# EAGLE board PBC-1 (EAGLE 7.1.0)
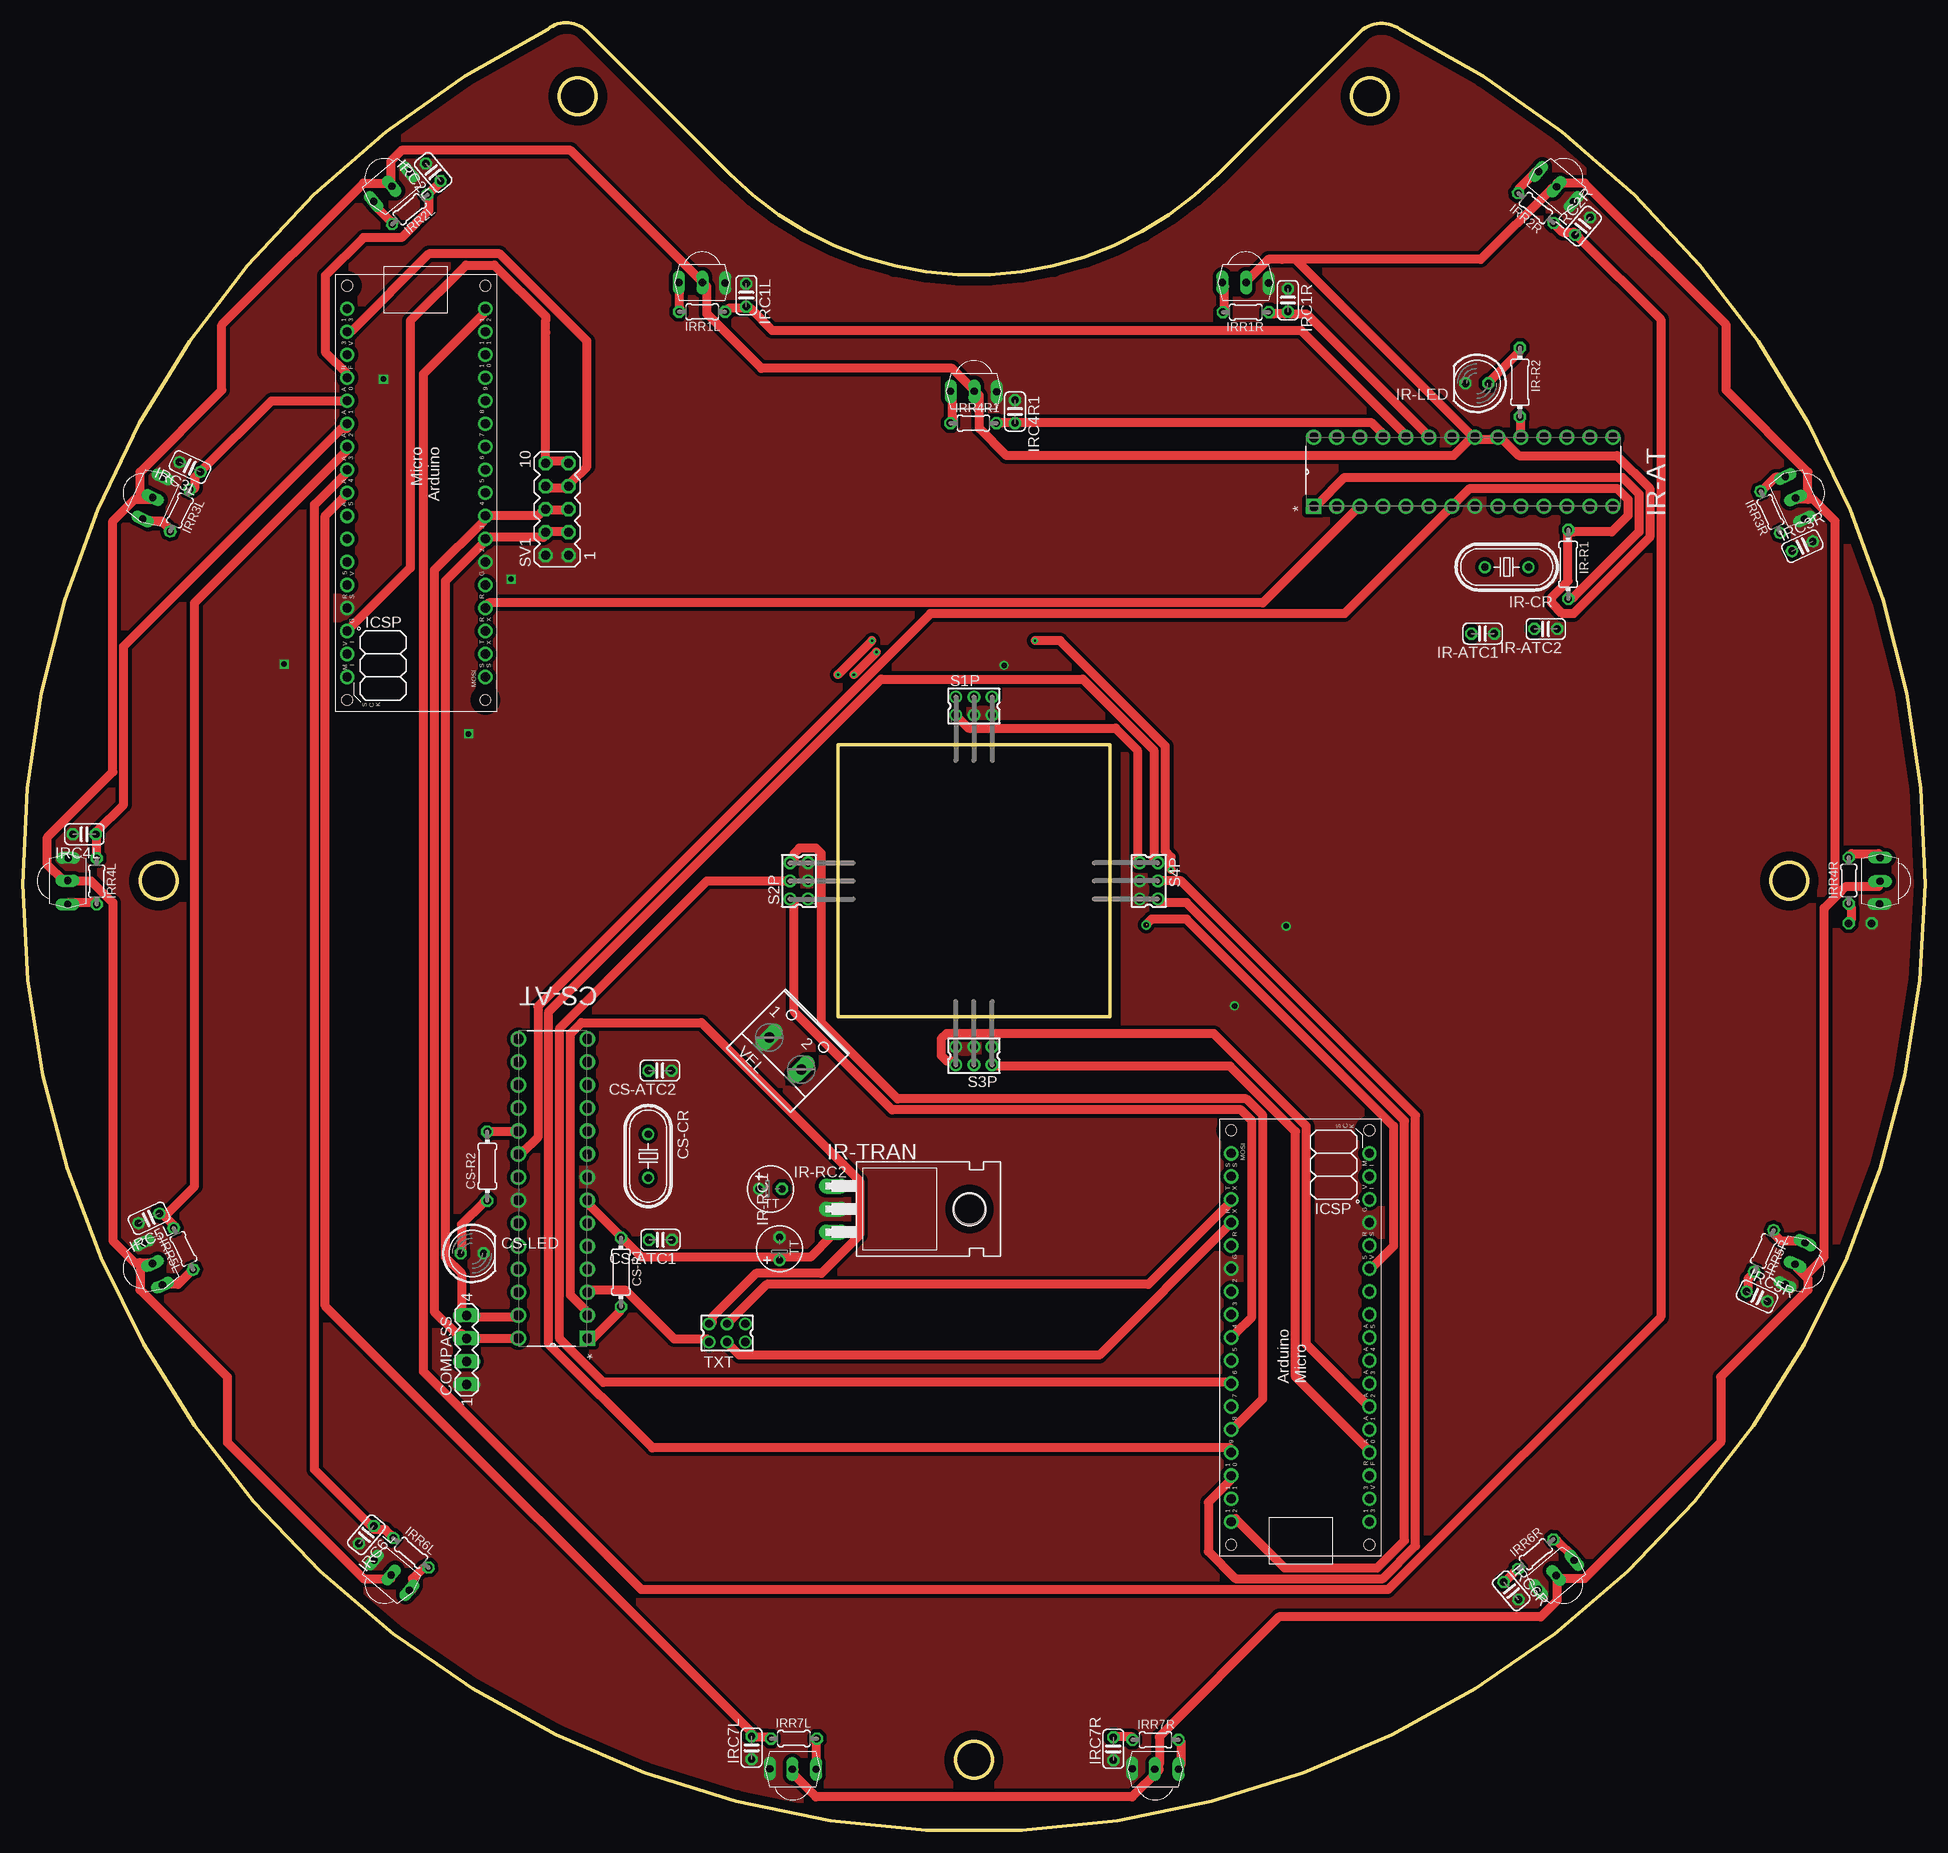
[diagram p0: board, top side]
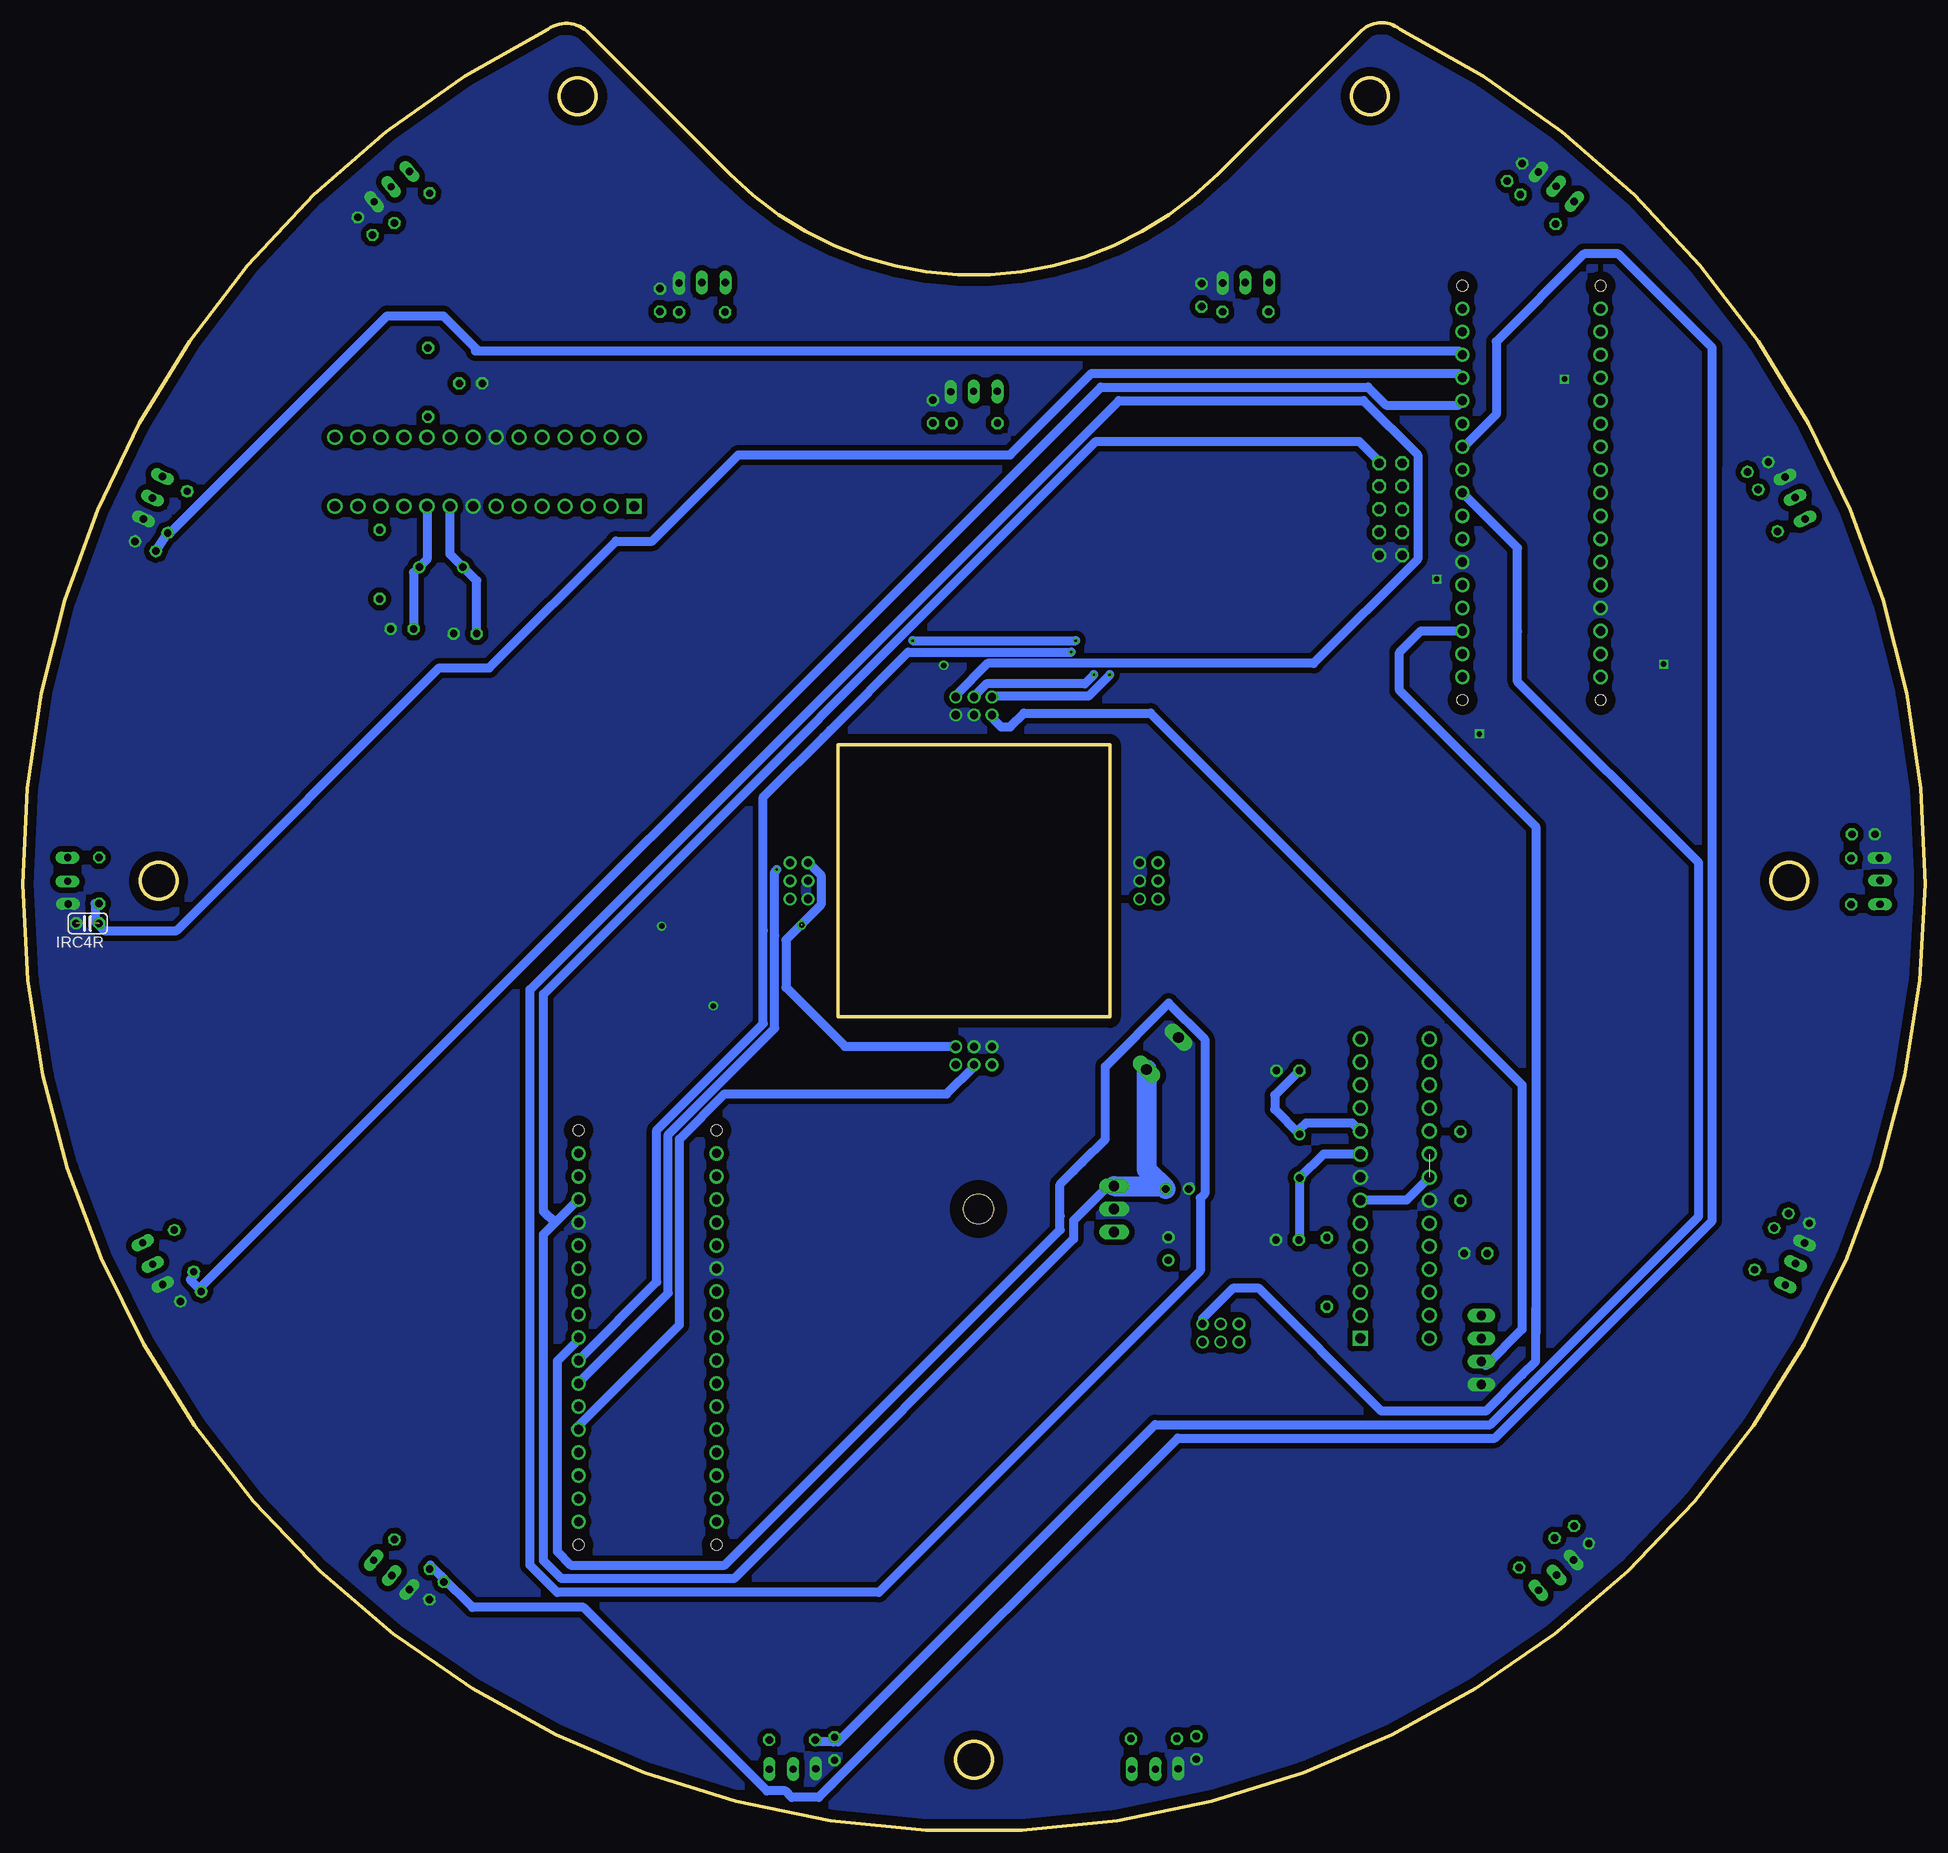
[diagram p1: board, bottom side, seen from below]

Size 210 x 199.47 mm. Coordinates in mm from the lower left corner, seen from the top.
Outline: 131.97,182.79 147.7,198.51 arc-76 152,198.76 arc-307 58,198.76 arc-86 62.4,198.41 78.03,182.79 arc90 131.97,182.79
Outline: 90,119.76 90,89.76 120,89.76 120,119.76 90,119.76
Outline: circle at 195,104.76 radius 2
Outline: circle at 15,104.76 radius 2
Outline: circle at 61.27,191.34 radius 2
Outline: circle at 148.73,191.34 radius 2
Outline: circle at 105,7.76 radius 2
Copper layers (1*16): Top 0.035mm / dielectric 1.5mm / Bottom 0.035mm
Design rules "default *": minimum track width 1mm, minimum drill 10mil, track to track 8mil, track to pad 8mil, pad to pad 8mil, via to via 8mil, smd to smd 8mil, copper to edge 40mil, drill to drill 8mil, minimum pad ring 10mil, minimum via ring 8mil, stop-mask expansion 4mil, vias tented up to drill 0mil, thermal gap 10mil

## Footprints (pad centres in the part's own frame; a part is rotated, then mirrored left to right if it is on the bottom)
MA04-1 = drill 1.016 long: 1 -3.81,0; 2 -1.27,0; 3 1.27,0; 4 3.81,0
DIP254P762X457-28 = drill 1.118 square: 1 -7.62,33.02 | drill 1.118: 2 -7.62,30.48; 3 -7.62,27.94; 4 -7.62,25.4; 5 -7.62,22.86; 6 -7.62,20.32; 7 -7.62,17.78; 8 -7.62,15.24; 9 -7.62,12.7; 10 -7.62,10.16; 11 -7.62,7.62; 12 -7.62,5.08; 13 -7.62,2.54; 14 -7.62,0; 15 0,0; 16 0,2.54; 17 0,5.08; 18 0,7.62; 19 0,10.16; 20 0,12.7; 21 0,15.24; 22 0,17.78; 23 0,20.32; 24 0,22.86; 25 0,25.4; 26 0,27.94; 27 0,30.48; 28 0,33.02
C025-024X044 = drill 0.813 octagon: 1 -1.27,0; 2 1.27,0
HC49U70 = drill 0.813: 1 -2.413,0; 2 2.413,0
LED5MM = drill 0.813 octagon: A -1.27,0; K 1.27,0
0204/7 = drill 0.813 octagon: 1 -3.81,0; 2 3.81,0
TT2D5 = drill 0.813: + -1.27,0 | drill 0.813 octagon: - 1.27,0
TO220H = drill 1.118 long: 1 -2.54,-10.16; 2 0,-10.16; 3 2.54,-10.16 | hole 3.302: 0,4.826
TSOP18XX = drill 0.813 long: GND -2.539,0.027; OUT 2.579,-0.027; VCC -0.041,-0.027
0204/5 = drill 0.813 octagon: 1 -2.54,0; 2 2.54,0
ARDUINO_MICRO = drill 1.016 pad 1.575: 3V3 6.35,1.27; +5V 31.75,1.27; A0 11.43,1.27; A1 13.97,1.27; A2 16.51,1.27; A3 19.05,1.27; A4 21.59,1.27; A5 24.13,1.27; D2 29.21,16.51; D3 26.67,16.51; D4 24.13,16.51; D5 21.59,16.51; D6 19.05,16.51; D7 16.51,16.51; D8 13.97,16.51; D9 11.43,16.51; D10 8.89,16.51; D11 6.35,16.51; D12 3.81,16.51; D13 3.81,1.27; GND 31.75,16.51; GND. 36.83,1.27; MISO] 41.91,1.27; MOSI 44.45,16.51; NC 26.67,1.27; NC. 29.21,1.27; REF 8.89,1.27; RST 34.29,16.51; RST. 34.29,1.27; RX1 36.83,16.51; SCK 44.45,1.27; SS 41.91,16.51; TX1 39.37,16.51; VIN 39.37,1.27 | hole 1.2: 1.27,1.27; 1.27,16.51; 46.99,16.51; 46.99,1.27
332-06 = drill 0.9 pad 1.27: 1 -2,-1; 2 -2,1; 3 0,-1; 4 0,1; 5 2,-1; 6 2,1
MA05-2 = drill 1.016 octagon: 1 -5.08,-1.27; 2 -5.08,1.27; 3 -2.54,-1.27; 4 -2.54,1.27; 5 0,-1.27; 6 0,1.27; 7 2.54,-1.27; 8 2.54,1.27; 9 5.08,-1.27; 10 5.08,1.27
87758-0616 = drill 0.9 pad 1.27: 1 -2,-1; 2 -2,1; 3 0,-1; 4 0,1; 5 2,-1; 6 2,1
W237-102 = drill 1.194 long: 1 -2.5,-1.27; 2 2.5,-1.27

## Placement (x,y rotation side)
COMPASS  [MA04-1]  49,53 90 top
CS-AT  ATMEGA328P-PU  [DIP254P762X457-28]  54.72,87.31 180 top
CS-ATC1  22 pF  [C025-024X044]  70.4,65.15 180 top
CS-ATC2  22 pF  [C025-024X044]  70.34,83.83 180 top
CS-CR  16 MHz  [HC49U70]  69.04,74.39 270 top
CS-LED  [LED5MM]  49.61,63.66 0 top
CS-R1  10k  [0204/7]  66.04,61.59 270 top
CS-R2  220  [0204/7]  51.29,73.27 90 top
IR-AT  ATMEGA328P-PU  [DIP254P762X457-28]  175.53,153.71 90 top
IR-ATC1  22 pF  [C025-024X044]  161.15,132.04 180 top
IR-ATC2  22 pF  [C025-024X044]  168.11,132.56 180 top
IR-CR  16 MHz  [HC49U70]  163.81,139.39 180 top
IR-LED  [LED5MM]  160.53,159.66 180 top
IR-R1  10k  [0204/7]  170.59,139.68 270 top
IR-R2  220  [0204/7]  165.26,159.77 270 top
IR-RC1  10uf  [TT2D5]  83.55,64.16 90 top
IR-RC2  10uf  [TT2D5]  82.56,70.77 0 top
IR-TRAN  7805  [TO220H]  99.68,68.55 270 top
IRC1L  [C025-024X044]  79.87,169.4 270 top
IRC1R  [C025-024X044]  139.65,168.85 270 top
IRC2L  [C025-024X044]  45.32,182.95 130 top
IRC2R  [C025-024X044]  172.19,177.01 50 top
IRC3L  [C025-024X044]  18.47,150.43 155 top
IRC3R  [C025-024X044]  196.45,141.69 25 top
IRC4L  [C025-024X044]  6.81,109.91 180 top
IRC4R  [C025-024X044]  202.82,100.07 180 bottom
IRC4R1  [C025-024X044]  109.54,156.55 270 top
IRC5L  [C025-024X044]  13.94,67.52 205 top
IRC5R  [C025-024X044]  191.43,58.9 335 top
IRC6L  [C025-024X044]  37.94,32.6 230 top
IRC6R  [C025-024X044]  164.3,26.42 310 top
IRC7L  [C025-024X044]  80.45,9.1 90 top
IRC7R  [C025-024X044]  120.39,8.99 90 top
IRD1L  TSOP2240  [TSOP18XX]  75,170.76 180 top
IRD1R  TSOP2240  [TSOP18XX]  135,170.76 180 top
IRD2L  TSOP2240  [TSOP18XX]  40.73,181.36 220 top
IRD2R  TSOP2240  [TSOP18XX]  169.27,181.36 140 top
IRD3L  TSOP2240  [TSOP18XX]  14.37,147.02 245 top
IRD3R  TSOP1840  [TSOP18XX]  195.63,147.02 115 top
IRD4L  TSOP2240  [TSOP18XX]  5,104.76 270 top
IRD4R  TSOP2240  [TSOP18XX]  205,104.76 90 top
IRD5L  TSOP2240  [TSOP18XX]  14.37,62.5 295 top
IRD5R  TSOP2240  [TSOP18XX]  195.63,62.5 65 top
IRD6L  TSOP2240  [TSOP18XX]  40.73,28.16 320 top
IRD6R  TSOP2240  [TSOP18XX]  169.27,28.16 40 top
IRD7L  TSOP2240  [TSOP18XX]  85,6.76 0 top
IRD7R  TSOP2240  [TSOP18XX]  125,6.76 0 top
IRDP  TSOP2240  [TSOP18XX]  105,158.76 180 top
IRR1L  [0204/5]  75.01,167.56 180 top
IRR1R  [0204/5]  135,167.53 180 top
IRR2L  [0204/5]  42.73,178.86 220 top
IRR2R  [0204/5]  167.02,179.01 140 top
IRR3L  [0204/5]  17.36,145.63 245 top
IRR3R  [0204/5]  192.91,145.45 115 top
IRR4L  [0204/5]  8.17,104.71 270 top
IRR4R  [0204/5]  201.56,104.8 90 top
IRR4R1  [0204/5]  104.94,155.27 0 top
IRR5L  [0204/5]  17.75,64.15 115 top
IRR5R  [0204/5]  192.19,63.93 245 top
IRR6L  [0204/5]  42.87,30.61 320 top
IRR6R  [0204/5]  167.01,30.47 40 top
IRR7L  [0204/5]  85.12,10.12 0 top
IRR7R  [0204/5]  125.05,9.97 0 top
PCB1  ARDUINO_MICRO  [ARDUINO_MICRO]  149.91,30.24 90 top
PCB3  ARDUINO_MICRO  [ARDUINO_MICRO]  34.56,171.71 270 top
S1P  [332-06]  105,124.06 0 top
S2P  [332-06]  85.7,104.76 90 top
S3P  [332-06]  105,85.46 180 top
S4P  [332-06]  124.3,104.76 270 top
SV1  [MA05-2]  59,145.76 90 top
TXT  [87758-0616]  77.76,54.87 0 top
VEL  [W237-102]  85.07,86.61 315 top

## Library data of the parts
COMPASS SV1 = con-lstb; OC_FARNELL: unknown; OC_NEWARK: unknown
CS-AT IR-AT = Atmel_By_element14_Batch_1-00; MPN: ATMEGA328P-PU; OC_FARNELL: 1715487; OC_NEWARK: 15R0268; PACKAGE: PDIP-28; SUPPLIER: Atmel
CS-ATC1 CS-ATC2 CS-R1 CS-R2 IR-ATC1 IR-ATC2 IR-R1 IR-R2 IRC1L IRC1R IRC2L IRC2R IRC3L IRC3R IRC4L IRC4R IRC4R1 IRC5L IRC5R IRC6L IRC6R IRC7L IRC7R IRR1L IRR1R IRR2L IRR2R IRR3L IRR3R IRR4L IRR4R IRR4R1 IRR5L IRR5R IRR6L IRR6R IRR7L IRR7R = rcl
CS-CR IR-CR = crystal; OC_FARNELL: unknown; OC_NEWARK: unknown
CS-LED IR-LED = led
IR-RC1 IR-RC2 = resistor
IR-TRAN = linear
IRD1L IRD1R IRD2L IRD2R IRD3L IRD3R IRD4L IRD4R IRD5L IRD5R IRD6L IRD6R IRD7L IRD7R IRDP = tsop
PCB1 PCB3 = E14_Arduino_revB
S1P S2P S3P S4P = con-garry
TXT = con-molex; MPN: 87758-0616; OC_FARNELL: 7472323; OC_NEWARK: 25M5667
VEL = con-wago-500; MPN: 237-102; OC_FARNELL: unknown; OC_NEWARK: 70K9898

## Nets
+3V3: PCB3.3V3 SV1.7 SV1.8
+5V-IR: CS-AT.7 CS-AT.20 CS-AT.21 CS-R1.1 IR-AT.7 IR-AT.20 IR-AT.21 IR-R1.1 IR-RC1.+ IR-TRAN.3 IRD1L.VCC IRD1R.VCC IRD2L.VCC IRD2R.VCC IRD3L.VCC IRD3R.VCC IRD4L.VCC IRD4R.VCC IRD5L.VCC IRD5R.VCC IRD6L.VCC IRD6R.VCC IRD7L.VCC IRD7R.VCC IRDP.VCC
+5V-LT: COMPASS.2 PCB1.+5V S1P.1 S3P.1 S4P.1
A0: PCB1.A0 S3P.2
A0IR: IRC7R.2 IRR7R.1 PCB3.D4
A1: PCB1.A1 S3P.4
A1IR: IRC6R.1 IRR6R.1 PCB3.D6
A2: PCB1.A2 S3P.6
A2IR: IRC5R.1 IRR5R.2 PCB3.D8
A3: PCB1.A3 S1P.2
A3IR: IRC4R.1 IRR4R.1 PCB3.D9
A4: PCB1.A4 S1P.4
A4IR: IRC3R.1 IRR3R.1 PCB3.D10
A5: PCB1.A5 S1P.6
A5IR: IRC2R.1 IRR2R.1 PCB3.D12
A6: PCB1.D4 S2P.2
A6IR: IRC2L.1 IRR2L.1 PCB3.A0
A7: PCB1.D6 S2P.4
A7IR: IRC3L.1 IRR3L.1 PCB3.A1
A8: PCB1.D8 S2P.6
A8IR: IRC4L.1 IRR4L.1 PCB3.A2
A9: PCB1.D9 S4P.2
A9IR: IRC5L.1 IRR5L.2 PCB3.A3
A10: PCB1.D10 S4P.4
A10IR: IRC6L.1 IRR6L.1 PCB3.A4
A11: PCB1.D12 S4P.6
A11IR: IRC7L.2 IRR7L.1 PCB3.A5
GND: COMPASS.1 CS-AT.8 CS-AT.22 CS-ATC1.1 CS-ATC2.1 CS-LED.K IR-AT.8 IR-AT.22 IR-ATC1.1 IR-ATC2.1 IR-LED.K IR-RC1.- IR-RC2.+ IR-TRAN.2 IRC1L.1 IRC1R.1 IRC2L.2 IRC2R.2 IRC3L.2 IRC3R.2 IRC4L.2 IRC4R1.1 IRC4R.2 IRC5L.2 IRC5R.2 IRC6L.2 IRC6R.2 IRC7L.1 IRC7R.1 IRD1L.GND IRD1R.GND IRD2L.GND IRD2R.GND IRD3L.GND IRD3R.GND IRD4L.GND IRD4R.GND IRD5L.GND IRD5R.GND IRD6L.GND IRD6R.GND IRD7L.GND IRD7R.GND IRDP.GND PCB1.GND PCB1.GND. PCB3.GND PCB3.GND. S1P.3 S1P.5 S2P.3 S2P.5 S3P.3 S3P.5 S4P.3 S4P.5 SV1.1 SV1.2 VEL.1
IR-CR: IR-AT.9 IR-ATC1.2 IR-CR.2
IRLOUT: IR-AT.24 IRC1L.2 IRR1L.1
IRPOUT: IR-AT.25 IRC4R1.2 IRR4R1.2
IRROUT: IR-AT.23 IRC1R.2 IRR1R.1
N$1: IR-LED.A IR-R2.1
N$2: IR-AT.19 IR-R2.2
N$4: IRD4R.OUT IRR4R.2
N$7: IRD7R.OUT IRR7R.2
N$8: IRD5R.OUT IRR5R.1
N$9: IRD2R.OUT IRR2R.2
N$11: IRD3R.OUT IRR3R.2
N$13: IRD1R.OUT IRR1R.2
N$14: IRD6R.OUT IRR6R.2
N$20: IRD3L.OUT IRR3L.2
N$21: IRD2L.OUT IRR2L.2
N$23: IRD1L.OUT IRR1L.2
N$24: IRD4L.OUT IRR4L.2
N$25: IRD5L.OUT IRR5L.1
N$27: IRD6L.OUT IRR6L.2
N$29: IRD7L.OUT IRR7L.2
N$32: S2P.1
N$33: IRDP.OUT IRR4R1.1
N$34: CS-LED.A CS-R2.1
N$35: CS-AT.19 CS-R2.2
PB6-A3: CS-AT.9 CS-ATC1.2 CS-CR.2
PB7-A1: IR-AT.10 IR-ATC2.2 IR-CR.1
PB7-A3: CS-AT.10 CS-ATC2.2 CS-CR.1
RESET-AT1: IR-AT.1 IR-R1.2
RESET-AT3: CS-AT.1 CS-R1.2
RX-CS: CS-AT.2 TXT.2
RX-IR: TXT.5
RX-LT: PCB1.RX1 TXT.3
SCL: COMPASS.3 CS-AT.28 PCB3.D3 SV1.5 SV1.6
SDA: COMPASS.4 CS-AT.27 PCB3.D2 SV1.3 SV1.4
TX-CS: CS-AT.3 TXT.1
TX-IR: PCB3.TX1 TXT.6
TX-IR2: IR-AT.3 PCB3.RX1
TX-LT: PCB1.TX1 TXT.4
VCC: IR-RC2.- IR-TRAN.1 PCB1.VIN PCB3.VIN SV1.9 SV1.10 VEL.2

## Tracks (layer width: path | path; a pad name or v marks a point on that pad's centre or on a via)
+3V3
  Top 1: SV1.8 58.07,148.07 59.88,148.07 SV1.7 60.48,148.68 62.28,150.48 62.28,164.32 52.66,173.94 44.84,173.94 36.42,165.52 PCB3.3V3
+5V-IR  (1 unrouted)
  Top 1: 40.63,181.76 40.63,184.17 41.83,185.37 60.48,185.37 74.92,170.94 IRD1L.VCC 75.52,170.33 75.52,167.33 81.54,161.31 102.59,161.31 105,158.9 IRDP.VCC 105.6,158.3 105.6,154.69 108.61,151.68 157.94,151.68 159.74,153.49 IR-AT.21 | 12.95,62.65 12.35,62.65 9.95,65.05 9.95,102.35 7.54,104.76 5.13,104.76 IRD4L.VCC 4.53,104.76 2.73,106.56 2.73,109.57 9.95,116.79 9.95,144.47 12.35,146.87 12.95,146.87 | 12.95,62.65 14.16,62.65 IRD5L.VCC | 12.95,62.65 12.95,59.64 22.58,50.01 22.58,42.79 37.62,27.75 40.63,27.75 IRD6L.VCC | 12.95,146.87 14.16,146.87 IRD3L.VCC | 40.63,181.76 37.62,181.76 21.98,166.12 21.98,158.9 12.95,149.88 12.95,146.87 | 40.63,181.76 IRD2L.VCC | CS-AT.20 55.07,74.68 56.87,76.48 56.87,90.92 100.19,134.24 145.91,134.24 157.34,145.67 IR-AT.7 157.94,146.27 159.74,148.07 175.99,148.07 177.19,146.87 177.19,145.07 175.39,143.26 171.17,143.26 IR-R1.1 170.57,143.26 170.57,137.85 168.77,136.04 168.77,135.44 169.97,134.24 171.17,134.24 179.6,142.66 179.6,148.07 175.99,151.68 165.16,151.68 163.35,153.49 IR-AT.20 162.75,153.49 160.35,153.49 IR-AT.21 | IRD1R.VCC 135.08,170.94 137.48,173.34 139,173.34 140.49,173.34 159.74,154.09 IR-AT.21 | 168.77,181.16 IRD2R.VCC 169.37,181.76 172.38,181.76 188.02,166.12 188.02,158.9 197.04,149.88 197.04,146.87 | IRD7L.VCC 85.15,6.7 85.15,6.1 87.55,3.69 122.44,3.69 125.45,6.7 IRD7R.VCC 125.45,7.3 125.45,10.31 138.69,23.54 167.56,23.54 169.37,25.35 169.37,27.75 | 169.37,27.75 172.38,27.75 187.42,42.79 187.42,50.01 197.04,59.64 197.04,60.84 196.74,61.14 | 196.74,61.14 195.84,62.05 IRD5R.VCC | 200.35,103.26 198.85,101.75 198.85,63.25 196.74,61.14
  Top 1: 200.35,103.26 201.25,104.16 204.86,104.16 IRD4R.VCC | 197.04,146.87 197.64,146.87 200.05,144.47 200.05,103.56 200.35,103.26 | 197.04,146.87 195.84,146.87 IRD3R.VCC | 169.37,27.75 IRD6R.VCC | CS-AT.7 62.28,69.27 65.89,65.66 CS-R1.1 66.5,65.05 68.3,63.25 83.34,63.25 IR-RC1.+ 83.94,63.25 86.95,63.25 89.36,65.66 IR-TRAN.3
  Top 1.016: 168.77,181.16 160.95,173.34 139,173.34
  Bottom 1.016: CS-AT.21 57.26,69.53 CS-AT.7
+5V-LT  (via drill 0.6)  (2 unrouted)
  Top 1: S1P.1 103.19,122.81 104.4,121.6 120.64,121.6 123.05,119.2 123.05,107.17 S4P.1 123.05,106.56 | 128.46,100.55 151.32,77.69 151.32,64.45 148.92,62.05 PCB1.+5V
  Top 1.016: 128.46,100.55 124.61,100.55 124.04,99.97
  Bottom 1: COMPASS.2 48.5,51.26 44.5,55.26 44.5,82.26 85.5,123.26 99.5,123.26 101,121.76 102,121.76 103,122.76 S1P.1 | 124.04,99.97 121.87,102.13 121.87,105.38 123.25,106.76 S4P.1 | 125.25,98.76 125.75,98.26 125.75,93.01 119.25,86.51 107,86.51 S3P.1
  Bottom 1.016: 124.04,99.97 125.25,98.76
  other vias: 124.02,99.89
A0
  Top 1: S3P.2 107.4,84.31 133.27,84.31 140.49,77.09 140.49,50.01 148.31,42.19 PCB1.A0
A0IR
  Top 1: IRC7R.2 120.64,10.31 122.44,10.31 IRR7R.1
  Bottom 1: IRR7R.1 122.5,9.76 120.5,9.76 IRC7R.2 120,9.76 85,44.76 48,44.76 25,67.76 25,106.76 45,126.76 45,132.26 | 51,147.26 PCB3.D4
  Bottom 1.016: 45,132.26 45,141.51 PCB3.D4
A1
  Bottom 1: S3P.4 105,84.26 108,81.26 132.5,81.26 137.5,76.26 137.5,55.76 149,44.26 PCB1.A1
A1IR
  Top 1: IRC6R.1 163.96,27.75 165.16,28.96 IRR6R.1
  Bottom 1: IRC6R.1 163.5,27.76 163.78,28.04 165,29.26 IRR6R.1 | 23.5,150.76 23.5,67.26 47.5,43.26 82.5,43.26 120.69,5.06 121,4.76 | 51,152.76 PCB3.D6
  Bottom 1.016: 23.5,150.76 23.5,163.59 33.87,173.96 37.66,173.96 47.34,164.28 47.34,156.25 50.93,152.66 PCB3.D6 | 163.78,28.04 160.33,24.59 148.11,24.59 127.84,4.33 125.81,4.33 125.12,3.63 122.13,3.63 120.69,5.06
A2
  Top 1: S3P.6 102.59,84.91 101.99,84.91 101.39,85.51 101.39,87.31 101.99,87.91 131.47,87.91 141.7,77.69 141.7,53.62 148.31,47.01 PCB1.A2
A2IR
  Top 1: IRC5R.1 190.43,59.64 190.43,60.84 191.03,61.44 IRR5R.2
  Bottom 1: 190.5,59.76 191.5,60.76 191,61.26 IRR5R.2 | 190.5,59.76 91,159.26 61.5,159.26 59.5,157.26 51.5,157.26 PCB3.D8 | 190.5,59.76 IRC5R.1
A3  (via drill 0.25)
  Top 1: v93.75,131.26 v90,127.51 | v111.75,131.26 114.5,131.26 126.12,119.63 126.12,108.01 126.75,107.38 v126.75,106.01
  Bottom 1: v90,127.51 92.37,125.13 103,125.13 S1P.2 | v111.75,131.26 v93.75,131.26 | 127,98.76 127,88.51 138.75,76.76 138.75,59.26 148.62,49.38 PCB1.A3
  Bottom 1.016: 127,98.76 127,105.76 v126.75,106.01
A3IR
  Top 1: IRC4R.1 201.86,100.55 201.86,101.75 IRR4R.1
  Bottom 1: IRR4R.1 202,102.26 202,100.26 IRC4R.1 201.5,99.76 201,99.26 193,99.26 164,128.26 158.5,128.26 144.5,142.26 140.5,142.26 131,151.76 101,151.76 92,160.76 51.5,160.76 PCB3.D9
A4  (via drill 0.25)
  Top 1: v94.25,130.01 v91.75,127.51
  Bottom 1: v91.75,127.51 92.75,126.51 103.62,126.51 105,125.13 S1P.4 | v94.25,130.01 112.25,130.01 120.85,121.41 121.62,120.63 | 128.25,99.26 128.25,89.01 140,77.26 140,60.51 148.62,51.88 PCB1.A4
  Bottom 1.016: 128.25,99.26 128.25,114.01 120.85,121.41
A4IR
  Bottom 1: 160,163.26 159.72,163.26 51.5,163.26 PCB3.D10
  Bottom 1.016: 159.72,163.26 163.58,167.12 169.74,167.12 193.71,143.15 IRR3R.1 IRC3R.1
A5
  Bottom 1: 94,72.76 93.07,73.69 90.5,76.26 90.5,84.26 83.5,91.26 79.5,87.26 79.5,70.26 80,69.76 80,61.76 115.5,26.26 151,26.26 154,29.26 154,92.76 89,157.76 62,157.76 56,151.76 56,140.26 67.5,128.76 103.5,128.76 107,125.26 S1P.6 | 95.5,67.76 95.5,66.26 132.5,29.26 149.5,29.26 151,30.76 151,51.76 148.5,54.26 PCB1.A5
  Bottom 1.016: 95.5,67.76 95.5,71.26 93.07,73.69
A5IR
  Top 1: IRR2R.1 169.37,176.95 169.97,176.35 171.17,176.35 IRC2R.1 171.78,175.75 180.8,166.72 180.8,56.63 150.72,26.55 68.3,26.55 44.24,50.62 44.24,160.71 50.85,167.33 PCB3.D12
A6
  Top 1: S2P.2 85.15,102.35 85.15,90.32 95.97,79.49 134.48,79.49 135.68,78.29 135.68,56.63 133.88,54.83 PCB1.D4
A6IR
  Top 1: IRC2L.1 46.04,181.76 44.84,180.56 IRR2L.1 44.84,179.96 44.84,178.76 41.83,175.75 37.62,175.75 33.41,171.54 33.41,163.11 35.81,160.71 PCB3.A0
A7
  Top 1: S2P.4 75.52,104.76 59.28,88.52 59.28,54.23 64.09,49.41 133.27,49.41 PCB1.D6
A7IR
  Top 1: IRR3L.1 18.97,148.07 18.97,149.28 19.57,149.88 IRC3L.1
  Top 1.016: IRC3L.1 27.47,157.74 PCB3.A1
A8
  Top 1: S2P.6 85.15,107.17 85.15,107.77 85.75,108.37 87.55,108.37 88.15,107.77 88.15,89.12 96.58,80.7 135.08,80.7 136.88,78.89 136.88,47.61 133.88,44.6 PCB1.D8
A8IR
  Top 1: IRR4L.1 8.14,107.77 8.14,109.57 IRC4L.1 8.14,110.17 11.15,113.18 11.15,130.63 35.21,154.69 35.81,154.69 PCB3.A2
A9
  Top 1: S4P.2 124.85,107.17 124.85,119.2 117.03,127.02 94.77,127.02 58.07,90.32 58.07,53.62 69.5,42.19 133.27,42.19 PCB1.D9
A9IR
  Top 1: 15.66,67.76 15.36,68.06 IRC5L.1 | 15.66,67.76 16.56,66.86 IRR5L.2 | 15.66,67.76 18.97,71.07 18.97,135.44 35.81,152.29 PCB3.A3
A10
  Top 1: S4P.4 127.86,104.76 153.73,78.89 153.73,31.36 150.12,27.75 133.88,27.75 130.87,30.76 130.87,36.18 133.27,38.58 PCB1.D10
A10IR
  Top 1: IRR6L.1 40.63,32.57 40.03,33.17 38.82,33.17 IRC6L.1 38.22,33.77 32.2,39.79 32.2,146.27 35.81,149.88 PCB3.A4
A11
  Top 1: S4P.6 125.45,102.35 128.46,102.35 152.52,78.29 152.52,31.97 149.52,28.96 139.29,28.96 133.88,34.37 PCB1.D12
A11IR
  Top 1: IRR7L.1 82.14,10.31 80.93,10.31 IRC7L.2 80.33,10.91 33.41,57.83 33.41,145.07 35.81,147.47 PCB3.A5
GND  (via drill 0.6)
  Bottom 1: 81.12,71.01 IR-RC2.+ | 83.62,65.51 IR-RC1.-
  other vias: 53.9,138.06 49.21,120.98 39.81,160.12 28.85,128.67 108.33,128.54 139.47,99.77 133.76,90.97
  pour Bottom (isolate 0.61, no thermals): -5,204.76 215,204.76 215,-5.24 -5,-5.24
  pour Top (isolate 0.406, no thermals): -5,204.76 215,204.76 215,-5.24 -5,-5.24
IR-CR
  Bottom 1.016: IR-AT.9 162.83,140.83 161.75,139.75 IR-CR.2 159.88,137.88 IR-ATC1.2
IRLOUT
  Top 1: IRR1L.1 77.93,167.93 79.73,167.93 IRC1L.2 80.33,167.93 82.74,165.52 141.09,165.52 152.52,154.09 IR-AT.24
IRPOUT
  Top 1: IRR4R1.2 108.01,155.29 109.21,155.29 IRC4R1.2 109.81,155.29 148.92,155.29 150.12,154.09 IR-AT.25
IRROUT
  Top 1: IRR1R.1 138.09,167.33 139.29,167.33 IRC1R.2 139.89,167.33 141.7,167.33 154.93,154.09 IR-AT.23
N$1
  Top 1: IR-LED.A 162.15,160.11 165.16,163.11 IR-R2.1
N$2
  Top 1.016: IR-AT.19 165.37,155.85 IR-R2.2
N$4
  Top 1: IRD4R.OUT 204.86,107.77 201.86,107.77 IRR4R.2
N$7
  Top 1: IRD7R.OUT 127.86,7.3 127.86,9.71 IRR7R.2
N$8
  Top 1: IRD5R.OUT 196.44,65.05 194.04,65.05 193.43,65.66 IRR5R.1
N$9
  Top 1: IRR2R.2 165.16,181.16 166.96,182.97 IRD2R.OUT
N$11
  Top 1: IRR3R.2 192.23,148.07 193.43,149.28 194.04,149.28 IRD3R.OUT
N$13
  Top 1: IRD1R.OUT 132.67,170.33 132.67,167.93 IRR1R.2
N$14
  Top 1: IRR6R.2 169.37,31.97 171.17,30.16 IRD6R.OUT
N$20
  Top 1: IRD3L.OUT 13.56,144.47 15.36,144.47 15.96,143.86 IRR3L.2
N$21
  Top 1: IRR2L.2 40.63,177.55 38.82,179.36 IRD2L.OUT
N$23
  Top 1: IRD1L.OUT 72.51,170.33 72.51,167.93 IRR1L.2
N$24
  Top 1: IRD4L.OUT 5.13,102.35 8.14,102.35 IRR4L.2
N$25
  Top 1: IRD5L.OUT 15.96,60.24 17.16,60.24 18.37,61.44 IRR5L.1
N$27
  Top 1: IRD6L.OUT 43.03,26.55 43.03,27.75 44.24,28.96 IRR6L.2
N$29
  Top 1: IRD7L.OUT 87.55,7.3 87.55,9.71 IRR7L.2
N$33
  Top 1: IRR4R1.1 102.59,155.29 102.59,158.3 IRDP.OUT
N$34
  Top 1: CS-LED.A 48.45,63.85 48.45,66.86 50.85,69.27 CS-R2.1
N$35
  Top 1: CS-R2.2 51.46,77.09 54.46,77.09 CS-AT.19
PB6-A3
  Bottom 1.016: CS-AT.9 66.41,74.61 CS-CR.2 69.04,65.24 CS-ATC1.2
PB7-A1
  Bottom 1.016: IR-AT.10 165.37,140.25 IR-CR.1 166.84,138.77 IR-ATC2.2
PB7-A3
  Bottom 1.016: CS-AT.10 63.23,78.04 68.34,78.04 69.04,77.33 CS-CR.1 71.79,79.55 71.79,81.11 CS-ATC2.2
RESET-AT1
  Top 1: IR-R1.2 171.17,136.04 178.39,143.26 178.39,147.47 176.59,149.28 145.91,149.28 142.9,146.27 IR-AT.1
RESET-AT3
  Top 1: CS-R1.2 65.89,57.23 62.89,54.23 CS-AT.1
RX-CS
  Top 1: TXT.2 76.12,56.03 76.12,56.63 80.93,61.44 88.15,61.44 92.36,65.66 92.36,71.67 74.92,89.12 61.68,89.12 60.48,87.91 60.48,59.04 62.28,57.23 CS-AT.2
RX-LT
  Top 1: TXT.3 77.93,53.62 79.13,52.42 118.84,52.42 133.27,66.86 PCB1.RX1
SCL
  Top 1: CS-AT.28 54.46,54.23 49.05,54.23 COMPASS.3 48.45,54.83 47.85,54.83 45.44,57.23 45.44,139.05 50.85,144.47 PCB3.D3 51.46,145.07 56.87,145.07 57.47,145.67 SV1.6 58.07,145.67 59.88,145.67 SV1.5
SDA
  Top 1: CS-AT.27 54.46,56.63 49.05,56.63 COMPASS.4 48.45,57.23 48.45,61.44 46.64,63.25 46.64,137.85 50.85,142.06 PCB3.D2 51.46,142.66 57.47,142.66 SV1.4 58.07,143.26 59.88,143.26 SV1.3
TX-CS
  Top 1: TXT.1 75.52,54.23 71.91,54.23 66.5,59.64 62.89,59.64 CS-AT.3
TX-IR
  Bottom 1: 60,46.26 48.5,46.26 44.5,50.26 | 43,110.76 43,57.51 43,54.76 | 51.5,132.26 PCB3.TX1
  Bottom 1.016: 43,110.76 58.03,125.79 58.03,129.96 55.65,132.34 PCB3.TX1 | 60,46.26 73.52,59.78 76.42,59.78 79.76,56.45 TXT.6 | 44.5,50.26 43,51.76 43,57.51
TX-IR2
  Top 1: PCB3.RX1 51.46,135.44 136.88,135.44 147.11,145.67 IR-AT.3
TX-LT
  Top 1: TXT.4 77.93,56.03 82.14,60.24 124.25,60.24 133.27,69.27 PCB1.TX1
VCC
  Top 1: SV1.10 58.07,151.08 59.88,151.08 SV1.9
  Top 1.016: SV1.10 57.73,165.25 57.73,166.64 57.73,167.05 52.06,172.72 48.95,172.72 42.78,166.55 42.78,139.29 PCB3.VIN
  Bottom 1: 151.25,67.01 152.5,65.76 152.5,29.76 150.5,27.76 131.5,27.76 94,65.26 94,67.26 90.5,70.76 IR-TRAN.1 | 151.25,67.01 149,69.26 PCB1.VIN | 151.25,67.01 152.5,68.26 152.5,92.26 91.5,153.26 62.5,153.26 60.5,151.26 SV1.9
  Bottom 2.184: VEL.2 85.94,72.88 IR-RC2.- 84.14,71.09 IR-TRAN.1

## Text on the board
200bmp: C:/Users/carlos hugo/Desktop/github/L16/electronica/PBC-2/InteliRobot.bmp